# Altium PCB PCB1.PcbDoc
Units mil, origin at the board's own origin, x right, y up, seen from the top; angles counter-clockwise.
Board outline 1240.16 x 1131.89 mil, 4 copper layers (L1 SIGNAL, L2(GND), IL3 GND, L4 SIGNAL), stack 61.811 mil thick; 35 components, 27 nets, 172 pads, 66 vias.
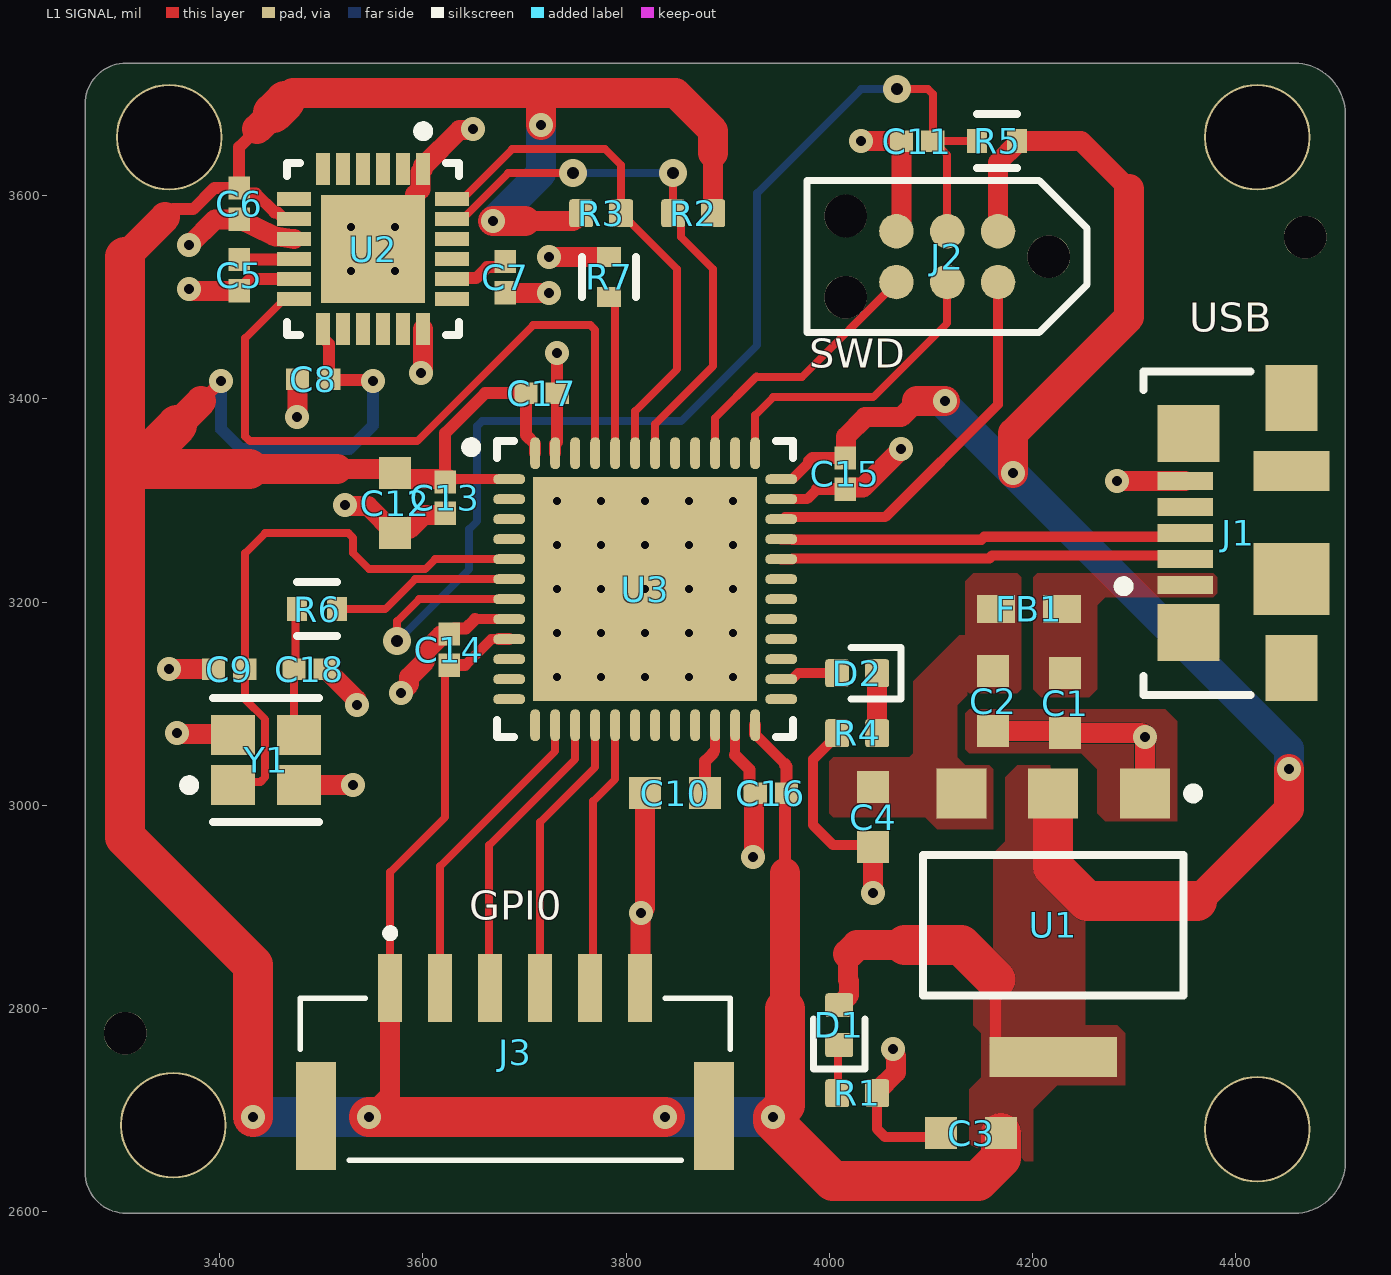
[diagram p0: L1 SIGNAL view]
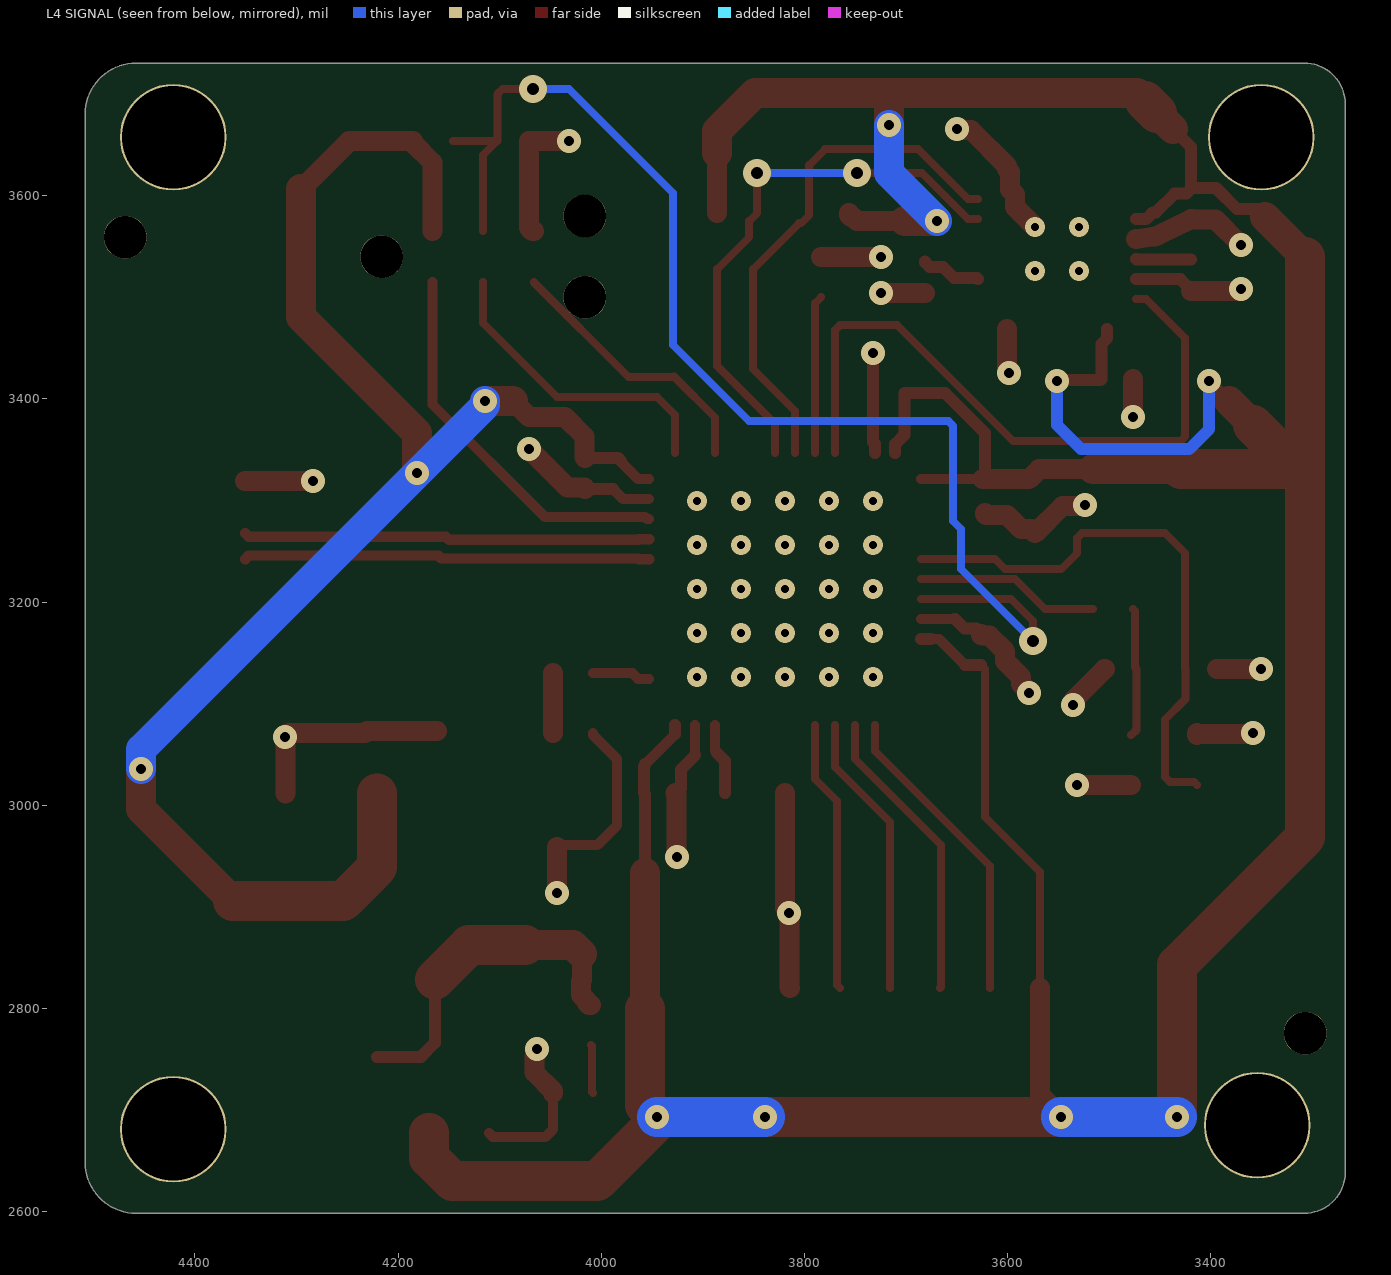
[diagram p1: L4 SIGNAL view, seen from below]
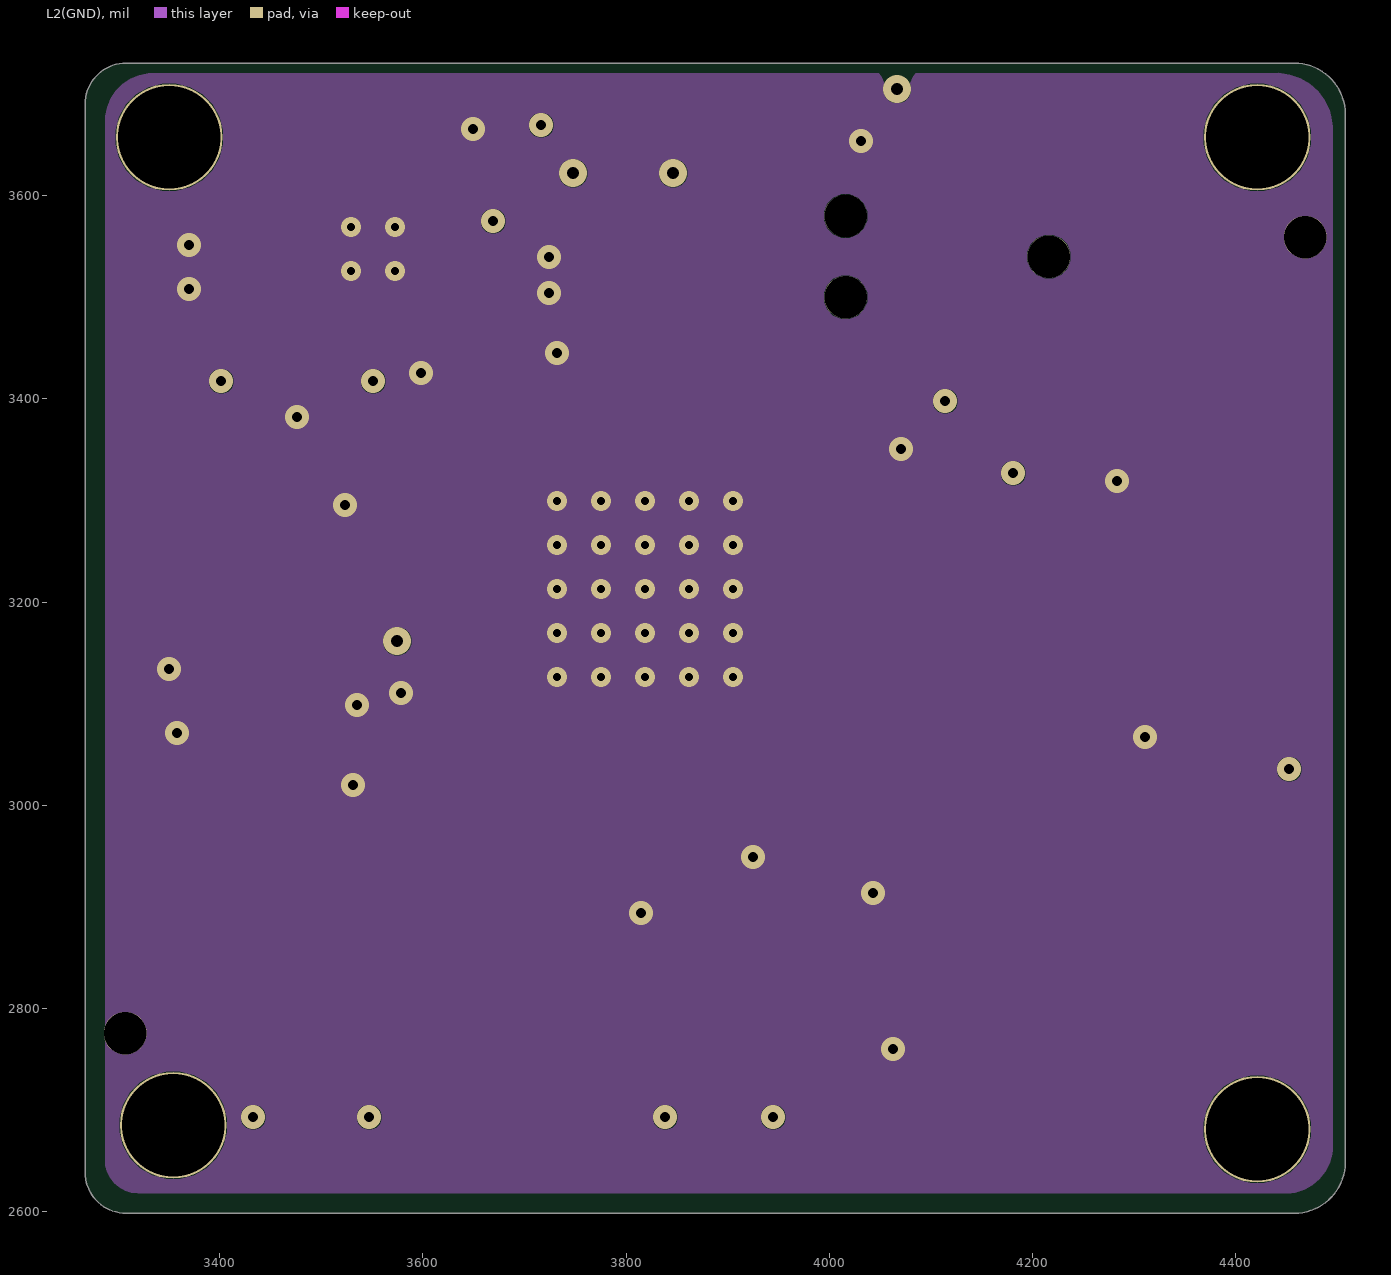
[diagram p2: L2(GND)]
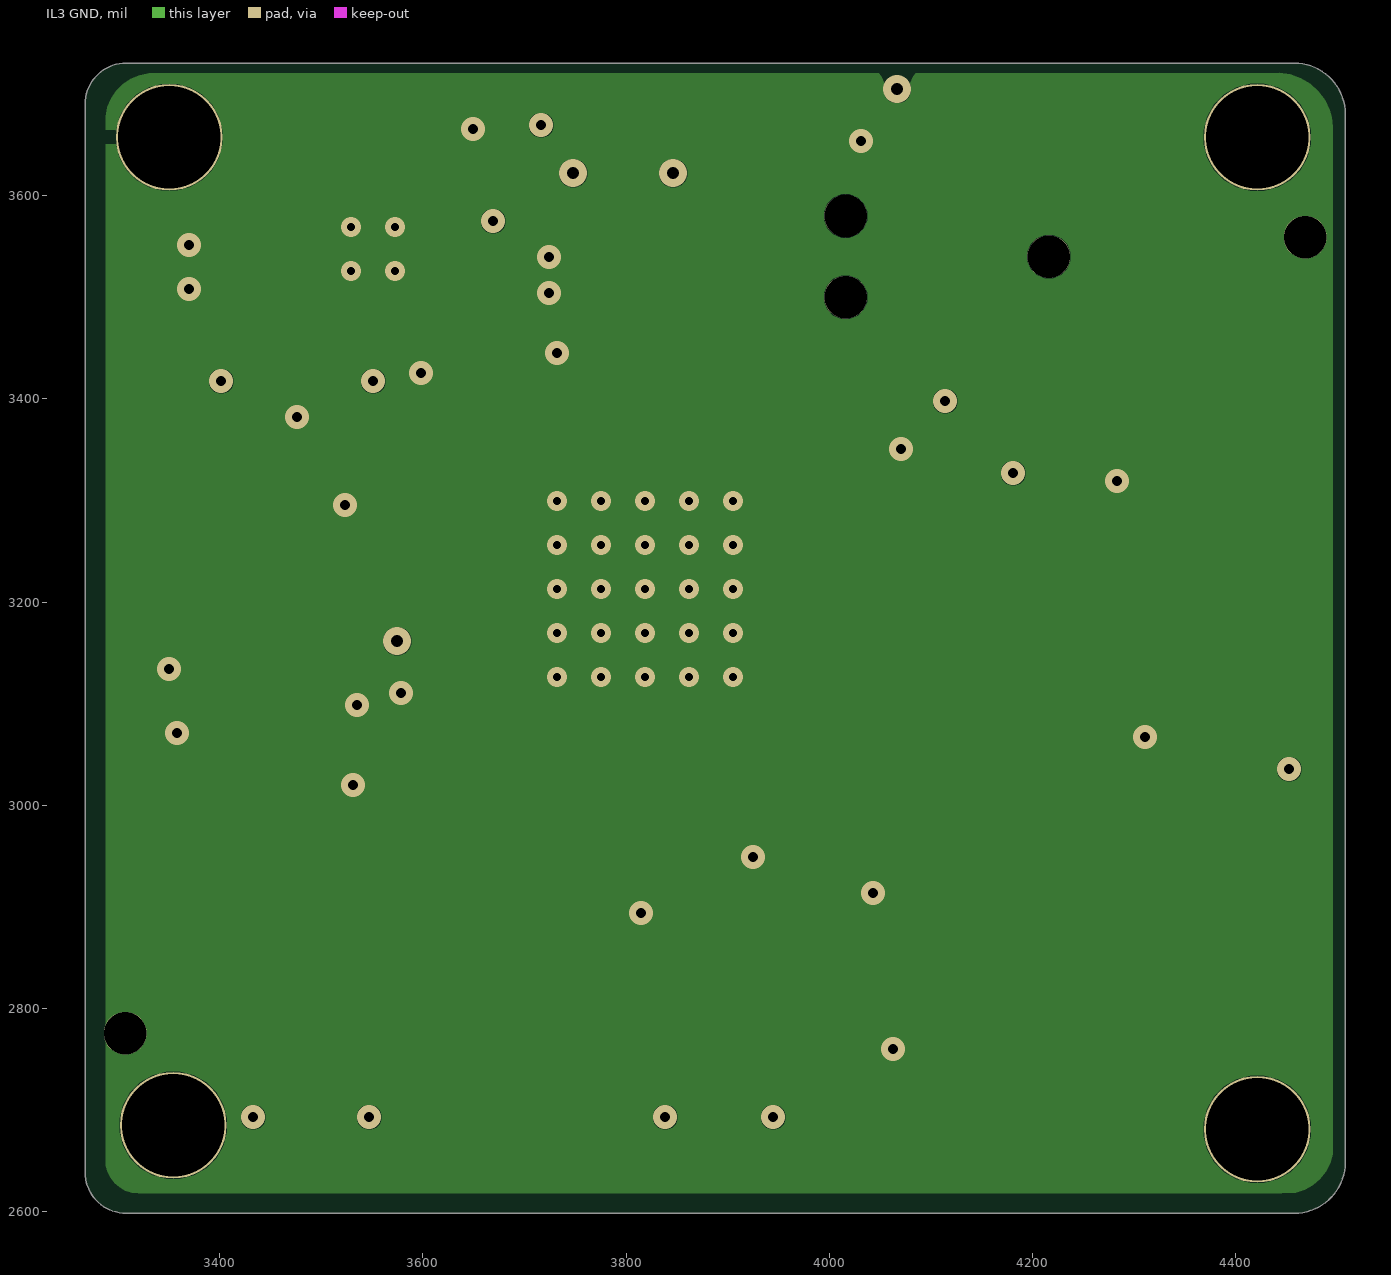
[diagram p3: IL3 GND]
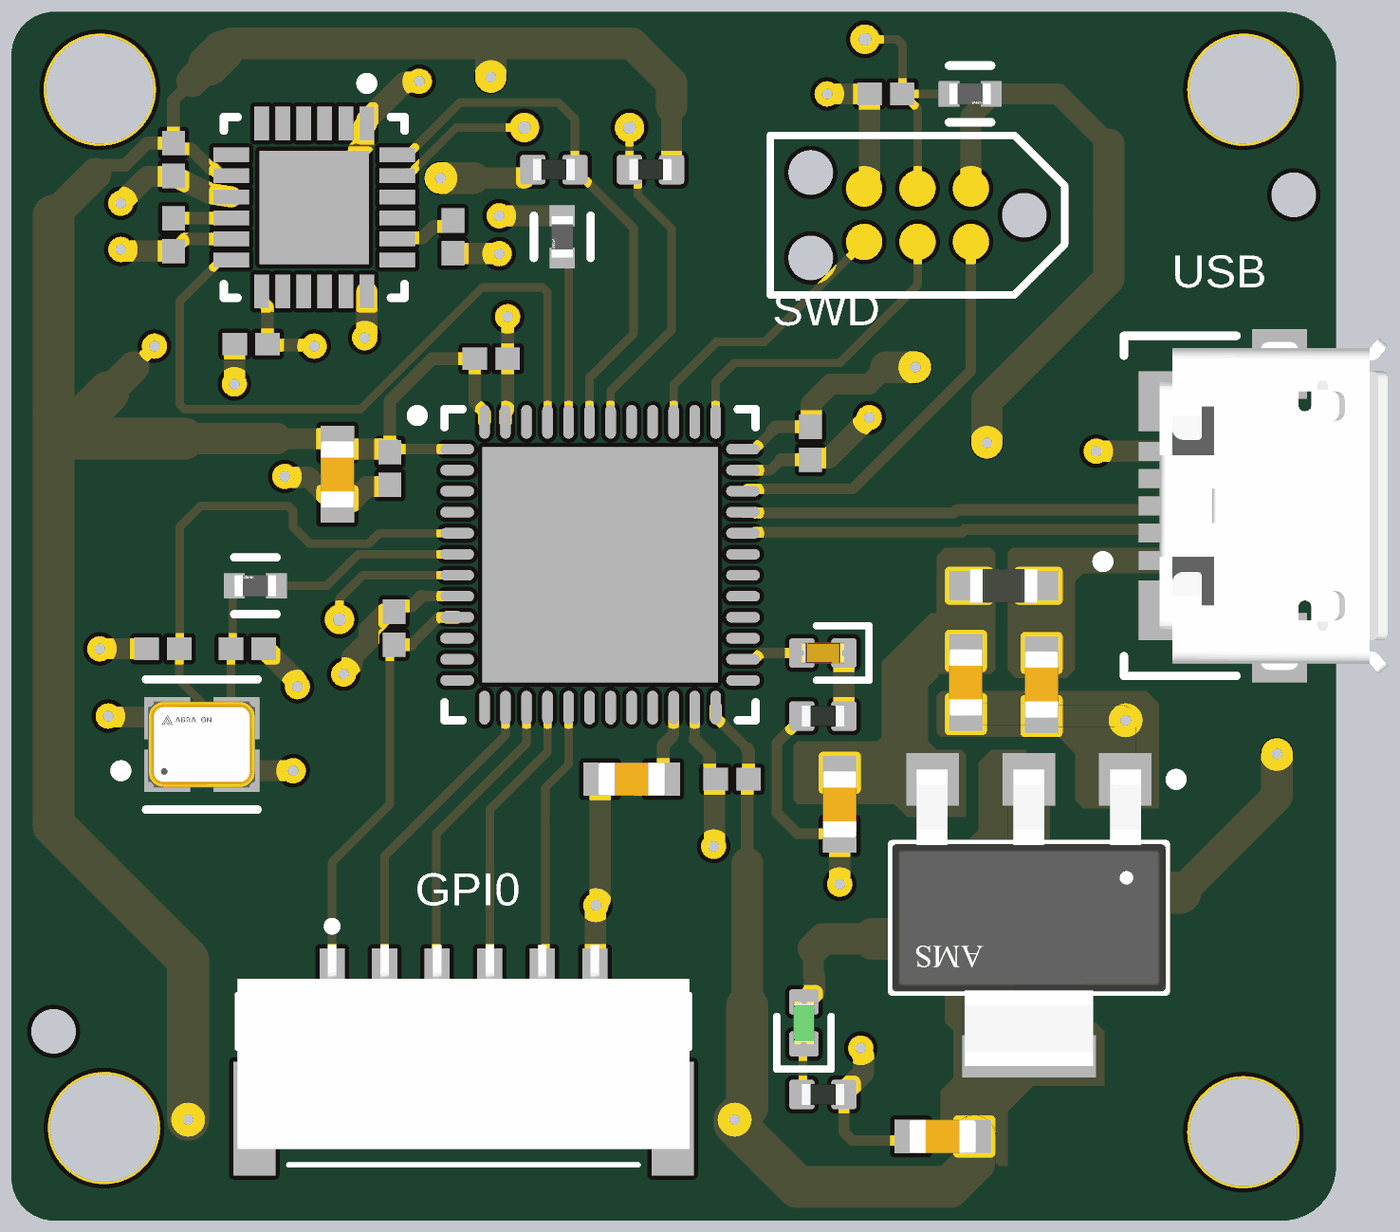
[diagram p4: 3D render of the assembled board from above, using the file's embedded part models]

## Layer stack, top to bottom
Top Solder: solder mask 1, SM-001, Dk 4
L1 SIGNAL: signal copper 1.378
Dielectric 1: prepreg 7.874, PP-017, Dk 4.6
L2(GND): signal copper 0.689
Dielectric 3: core 41.9291, Core-039, Dk 4.6
IL3 GND: signal copper 0.689
Dielectric 5: prepreg 7.874, PP-017, Dk 4.6
L4 SIGNAL: signal copper 1.378
Bottom Solder: solder mask 1, SM-001, Dk 4

## Board outline
3267.72,2638.58 ccw(c3307.87,2638.58) 3307.87,2598.43 4457.87,2598.43 ccw(c4457.87,2648.43) 4507.87,2648.43 4507.87,3680.32 ccw(c4457.87,3680.32) 4457.87,3730.32 3307.87,3730.32 ccw(c3307.87,3690.16) 3267.72,3690.16

## Design rules (kind name [scope] priority, off if disabled: settings)
Clearance [All] p1: gap=0.2 ignorepadtopadclearanceinfootprint=FALSE
DiffPairsRouting [All] p1: maxlimit=10 minlimit=8 mostfreqgap=10 toplayer_maxgap=8 toplayer_prefgap=8 toplayer_minwidth=10.28 toplayer_maxwidth=10.28 toplayer_prefwidth=10.28 bottomlayer_maxgap=8 bottomlayer_prefgap=8 bottomlayer_minwidth=10.28 bottomlayer_maxwidth=10.28 bottomlayer_prefwidth=10.28 impedanceprofiledriven=TRUE impedanceprofileid={FE83A02F-520A-4545-8AD8-354C31CD3F95} impedanceprofilevalue=90.000000 maxuncoupledlength=500
PolygonConnect [All] p1: connectstyle=Direct reliefconductorwidth=10 reliefentries=4 polygonreliefangle="90 Angle" airgapwidth=10
RoutingVias [All] p1: holewidth=11.81 width=27.56 viastyle="Through Hole" minholewidth=9.84 minwidth=10.04 maxholewidth=15.75 maxwidth=35.43
SolderMaskExpansion [All] p1: expansion=4 istentingtop=FALSE
SupplyNets "Schematic Supply Nets_3" [InNet('VBUS')] p1: voltage=0.000
SupplyNets "Schematic Supply Nets_2" [InNet('+3V3')] p2: voltage=0.000
SupplyNets "Schematic Supply Nets_1" [InNet('GND')] p3: voltage=0.000
SupplyNets "Schematic Supply Nets" [InNet('+5V')] p4: voltage=0.000
Width [All] p1: maxlimit=39.37 minlimit=7.87 preferedwidth=11.81 midlayer1_minwidth=10 midlayer1_maxwidth=10 midlayer1_prefwidth=10 midlayer2_minwidth=10 midlayer2_maxwidth=10 midlayer2_prefwidth=10 minimp=50.000000 maximp=50.000000 favimp=50.000000
29 further rules are at their usual default settings.

## Classes and differential pairs
net class diff_usb: USB_D_N USB_D_P
differential pair USB_D: +USB_D_P -USB_D_N

## Components (designator, comment, footprint, x,y, rotation, side; value= is the part's Value field where it differs from the comment)
C1 "2u2" WCAP-CSGP_0603_L1.6W0.8H0.8_Reflow 4232.28,3100.39 r270 top
C2 "2u2" WCAP-CSGP_0603_L1.6W0.8H0.8_Reflow 4161.42,3102.36 r270 top
C3 "22uf 0604 MASSOUT" WCAP-CSGP_0603_L1.6W0.8H0.8_Reflow 4139.76,2677.17 r180 top
C4 "22uf 0604 MASSOUT" WCAP-CSGP_0603_L1.6W0.8H0.8_Reflow 4043.31,2988.19 r270 top
C5 "2n2F" CAPC1005X56X25LL10T15 3419.29,3521.65 r90 top
C6 "10nF" CAPC1005X56X25LL10T15 3419.29,3592.13 r90 top
C7 "100nF" CAPC1005X56X25LL10T15 3681.1,3519.68 r90 top
C8 "100nF" CAPC1005X56X25LL10T15 3492.13,3419.29 r0 top
C9 "10pF" CAPC1005X56X25LL10T15 3409.45,3133.86 r180 top
C10 "2u2" WCAP-CSGP_0603_L1.6W0.8H0.8_Reflow 3848.43,3011.81 r180 top
C11 "100nF" CAPC1005X56X25LL10T15 4086.61,3653.54 r0 top
C12 "2.2u" WCAP-CSGP_0603_L1.6W0.8H0.8_Reflow 3572.83,3297.24 r270 top
C13 "100nF" CAPC1005X56X25LL10T15 3622.05,3302.76 r90 top
C14 "100nF" CAPC1005X56X25LL10T15 3625.98,3153.15 r270 top
C15 "100nF" CAPC1005X56X25LL10T15 4015.75,3326.38 r90 top
C16 "100nF" CAPC1005X56X25LL10T15 3942.52,3011.81 r0 top
C17 "100nF" CAPC1005X56X25LL10T15 3716.93,3405.51 r180 top
C18 "10pF" CAPC1005X56X25LL10T15 3488.58,3133.86 r180 top
D1 "GREEN" LED_0402_GREEN 4009.84,2783.46 r270 top
D2 "RED" LED_0402_RED 4027.56,3129.92 r0 top
FB1 "120R" "WE-CBF HF_0603_HC" 4196.85,3192.91 r180 top
J1 "473460001" FP-473460001-MFG 4441.34,3267.72 r90 top
J2 "TC2030-NL" TC2030-NL-FP 4116.14,3539.96 r180 top
J3 "SM06B-GHS-TB" JST_SM06B-GHS-TB 3690.94,2746.06 r0 top
R1 "1K" RES_0402 4027.56,2716.54 r180 top
R2 "2K2" RES_0402 3866.14,3582.68 r0 top
R3 "2K2" RES_0402 3775.59,3582.68 r180 top
R4 "1K" RES_0402 4027.56,3070.87 r0 top
R5 "10K" FP-AC0402-MFG 4165.35,3653.54 r0 top
R6 "0R" FP-AC0402-MFG 3496.06,3192.91 r180 top
R7 "10K" FP-AC0402-MFG 3783.46,3519.68 r270 top
U1 "AMS1117-3.3" FP-AMS1117-IPC_C 4220.47,2881.89 r270 top
U2 "MPU-6050" IS-QFN-24_V 3551.18,3547.24 r270 top
U3 "STM32F411CEU6" STM-UFQFPN48_L 3818.9,3212.6 r0 top
Y1 "24MHz" FP-ABM10AIG-MFG 3445.87,3044.29 r0 top

## Footprints (in the part's own frame and the unit in brackets; to place one, negate y for a bottom-side part, rotate by r counter-clockwise, add the part's x,y. Pads: shape width x height; smd on the part's side, far side on the other; paste and mask are expansions set on the pad)
CAPC1005X56X25LL10T15 [mm] "Chip Capacitor, 2-Leads, Body 1.00x0.50mm, IPC High Density"
  rect 0.58x0.54 smd: 1(-0.39,0) 2(0.39,0)
  body extent -0.55,-0.3 0.55,0.3, height 0.56
FP-473460001-MFG [mm]
  rect 0.45x1.38 smd paste+0 mask+0: 1(-1.3,2.31) 2(-0.65,2.31) 3(0,2.31) 4(0.65,2.31) 5(1.3,2.31)
  rect 1.425x1.55 smd paste+0 mask+0: 6(-2.488,2.225) 7(2.488,2.225)
  rect 1.65x1.3 smd paste+0 mask+0: 8(-3.375,-0.35) 11(3.375,-0.35)
  rect 1.8x1.9 smd paste+0 mask+0: 9(-1.15,-0.35)
  rect 1x1.9 smd paste+0 mask+0: 10(1.55,-0.35)
  silkscreen extent -4.05,0.67 4.05,3.97, body extent -3.99,-2.93 3.99,2.5, height 2.98
FP-ABM10AIG-MFG [mm]
  rect 1.1x1 smd paste+0 mask+0: 1(-0.825,-0.625) 2(0.825,-0.625) 3(0.825,0.625) 4(-0.825,0.625)
  silkscreen extent -2.05,-1.55 1.33,1.55, body extent -1.48,-1.22 1.48,1.22, height 0.25
FP-AC0402-MFG [mm]
  rect 0.5x0.6 smd paste+0 mask+0: 1(-0.5,0) 2(0.5,0)
  silkscreen extent -0.5,-0.67 0.5,0.67, body extent -0.85,-0.4 0.85,0.4, height 0.25
FP-AMS1117-IPC_C [mm]
  rect 1.25x1.25 smd paste+0 mask+0: 1(-3.295,2.29) 2(-3.295,0) 3(-3.295,-2.29)
  rect 1.004x3.182 smd paste+0 mask+0: 4(3.295,0)
  silkscreen extent -3.42,-3.25 1.75,3.63, body extent -3.9,-3.35 3.9,3.35, height 0.25
IS-QFN-24_V [mm] "QFN, 24-Leads, Body 4x4mm, Pitch 0.5mm, Thermal Pad 2.7x2.6mm"
  rect 0.8x0.35 smd: 1(-2,1.25) 2(-2,0.75) 3(-2,0.25) 4(-2,-0.25) 5(-2,-0.75) 6(-2,-1.25) 13(2,-1.25) 14(2,-0.75) 15(2,-0.25) 16(2,0.25) 17(2,0.75) 18(2,1.25)
  rect 0.35x0.85 smd mask+0.102: 7(-1.25,-1.975) 8(-0.75,-1.975) 9(-0.25,-1.975) 10(0.25,-1.975) 11(0.75,-1.975) 12(1.25,-1.975) 19(1.25,1.975) 20(0.75,1.975) 21(0.25,1.975) 22(-0.25,1.975) 23(-0.75,1.975) 24(-1.25,1.975)
  rect 2.7x2.6 smd: 25(0,0)
  silkscreen extent -3.07,-2.15 2.15,2.15, body extent -2,-2 2,2, height 0.95
JST_SM06B-GHS-TB [mm]
  rect 0.6x1.7 smd paste+0 mask+0.102: 1(-3.125,1.875) 2(-1.875,1.875) 3(-0.625,1.875) 4(0.625,1.875) 5(1.875,1.875) 6(3.125,1.875)
  rect 1x2.7 smd paste+0 mask+0.102: MP1(-4.975,-1.325) MP2(4.975,-1.325)
  silkscreen extent -5.38,-2.42 5.38,3.35, body extent -5.38,-2.05 5.38,2.8, height 4.25
LED_0402_GREEN [mm]
  rrect25% 0.6x0.7 smd: A(-0.5,0) K(0.5,0)
  silkscreen extent -0.15,-0.65 1.1,0.65, body extent -0.51,-0.25 0.51,0.25, height 0.45
LED_0402_RED [mm]
  rrect25% 0.6x0.7 smd: A(-0.5,0) K(0.5,0)
  silkscreen extent -0.15,-0.65 1.1,0.65, body extent -0.51,-0.25 0.51,0.25, height 0.45
RES_0402 [mm]
  rrect25% 0.6x0.7 smd: 1(-0.5,0) 2(0.5,0)
  body extent -0.5,-0.25 0.5,0.25, height 0.3
STM-UFQFPN48_L [mm] "QFN, 48-Leads, Body 7.1x7.1mm, Pitch 0.5mm, Thermal Pad 5.6x5.6mm, IPC High Density"
  oval 0.8x0.25 smd: 1(-3.4,2.75) 2(-3.4,2.25) 3(-3.4,1.75) 4(-3.4,1.25) 5(-3.4,0.75) 6(-3.4,0.25) 7(-3.4,-0.25) 8(-3.4,-0.75) 9(-3.4,-1.25) 10(-3.4,-1.75) 11(-3.4,-2.25) 12(-3.4,-2.75) 25(3.4,-2.75) 26(3.4,-2.25) 27(3.4,-1.75) 28(3.4,-1.25) 29(3.4,-0.75) 30(3.4,-0.25) 31(3.4,0.25) 32(3.4,0.75) 33(3.4,1.25) 34(3.4,1.75) 35(3.4,2.25) 36(3.4,2.75)
  oval 0.25x0.8 smd: 13(-2.75,-3.4) 14(-2.25,-3.4) 15(-1.75,-3.4) 16(-1.25,-3.4) 17(-0.75,-3.4) 18(-0.25,-3.4) 19(0.25,-3.4) 20(0.75,-3.4) 21(1.25,-3.4) 22(1.75,-3.4) 23(2.25,-3.4) 24(2.75,-3.4) 37(2.75,3.4) 38(2.25,3.4) 39(1.75,3.4) 40(1.25,3.4) 41(0.75,3.4) 42(0.25,3.4) 43(-0.25,3.4) 44(-0.75,3.4) 45(-1.25,3.4) 46(-1.75,3.4) 47(-2.25,3.4) 48(-2.75,3.4)
  rect 5.6x5.6 smd: 49(0,0)
  silkscreen extent -4.47,-3.7 3.7,3.7, body extent -3.55,-3.55 3.55,3.55, height 0.6
TC2030-NL-FP [mil]
  round 33.98 smd paste-16.99: 1(-50,-25) 2(-50,25) 3(0,-25) 4(0,25) 5(50,-25) 6(50,25)
  round 42.01 hole 42.01 unplated: MH(-100,0) MH(100,-40) MH(100,40)
  silkscreen extent -138,-75 138,75
WCAP-CSGP_0603_L1.6W0.8H0.8_Reflow [mm] "Ceramic Capacitors, body 1.6x0.8mm"
  rect 0.8x0.8 smd: 1(-0.75,0) 2(0.75,0)
  body extent -0.8,-0.4 0.8,0.4, height 0.8
"WE-CBF HF_0603_HC" [mm] "SMD EMI Suppression Ferrite  Bead, body 1.60x0.80mm"
  rect 0.95x0.7 smd: 1(-0.825,0) 2(0.825,0)
  body extent -0.8,-0.4 0.8,0.4, height 0.8

## Part data
C1 C2 C3 C4 C10 C12: library part CMP-03913-53914739-2, "WCAP-CSGP 0603 (1608Metric) Ceramic Capacitor 0.063Lx0.031W 1.60mmx0.80mm X7R ±10% 220pF", Capacitance=220pF, Case Code (Imperial)=0603, Case Code (Metric)=1608, Dielectric=X7R, Insulation Resistance=10GΩ, Max Operating Temperature=125°C, Min Operating Temperature=-55°C, Tolerance=10%, Voltage Rating=16V, Case/Package=0603, Height=800µm, Length=1.6mm, Mount="Surface Mount", Packaging="Tape & Reel (TR)", RoHS=Compliant, Thickness=863.6µm, Voltage Rating (DC)=16V, Width=800µm
C5 C6 C7 C8 C9 C11 C13 C14 C15 C16 C17 C18: library part CMP-2008-02845-1, Manufacturer="AVX Interconnect / Elco", Part Number=0402YD223KAT2A
D1: library part LED_0402_GREEN, "LED 0402 GREEN SMD"
D2: "LED 0402 RED SMD"
FB1: library part CMP-0220-00101-3, "Ferrite Bead (emi Suppression), 1.6X0.8X0.8MM (0603), 600O Impedance At 100 Mhz", Case Code (Imperial)=0603, Case Code (Metric)=1608, Case/Package=SMD/SMT, Current Rating=400mA, DC Resistance (DCR)=220mΩ, Max Current Rating=500mA, Max Operating Temperature=125°C, Min Operating Temperature=-55°C, Resistance=350mΩ, Test Frequency=100MHz, Tolerance=25%, Core Material=Ferrite, Depth=800µm, Height=800µm, Impedance=600Ω, Lead Free="Lead Free", Length=1.6mm, Max DC Current=500mA, Mount="Surface Mount", Number of Lines=1, Number of Pins=2, REACH SVHC=Unknown, RoHS=Compliant, Termination=SMD/SMT, Width=800µm
J1: library part CMP-2000-05246-2, "CONN RCPT USB2.0 MICRO B SMD R/A", Current Rating=1.8A, Manufacturer=Molex, Package=0, Temperature="-30°C to +85°C", Temperature Range High=+85°C, Temperature Range Low=-30°C, Voltage Rating=30V, Automotive=No, Category=Conn, ComponentLink2Description=Datasheet, ComponentLink2URL=https://www.molex.com/webdocs/datasheets/pdf/en-us/0473460001_IO_CONNECTORS.pdf, Conn Orientation="Right Angle", Contact Material=Gold,Nickel, Device Class L1=Connectors, Device Class L2="USB Connectors", Device Class L3=unset, Digikey Description="CONN RCPT USB2.0 MICRO B SMD R/A", Footprint Url=https://www.molex.com/pdm_docs/sd/473460001_sd.pdf, Height=2.945mm, Is Female=yes, Lead Free=Yes, Manufacturer Part Number=473460001, Number Of Contacts=5, Octopart=https://octopart.com/47346-0001-molex-7164928, Pitch=0.65mm, RoHS=TRUE, Shielding=true, Usb Standard="USB 2.0"
J2: "Tag-Connect No-Solder SWD Debug Connector (No Legs) DO NOT PLACE", Manufacturer=Tag-Connect, Manufacturer Part Number=TC2030-NL-FP
J3: library part CMP-002-00176-1, "Connector Header Surface Mount, Right Angle 6 position 0.049 (1.25mm)", Case/Package=None, Check_prices=https://www.snapeda.com/parts/SM06B-GHS-TB/JST/view-part/?ref=eda, Component Type=Standard, Design Item ID=SM06B-GHS-TB, MF="JST Sales", MP=SM06B-GHS-TB, Pins=6, SnapEDA_Link=https://www.snapeda.com/parts/SM06B-GHS-TB/JST/view-part/?ref=snap, Source=SM06B-GHS-TB.SchLib
R1 R2 R3 R4: library part RES_0402, "Resistor SMD 0402"
R5 R6 R7: library part CMP-03412-025001-2, "RES 11.3kΩ ±0.5% 0.063W 0402", RoHS Compliant=Yes
U1: library part CMP-209535-000001-1, "LDO Voltage Regulators 1A, 3.3V", Dropout Voltage=1.1V, Manufacturer="Advanced Monolithic Systems", Max Junction Temp=+125°C, Max Power Dissipation=1.2W, Max Supply Voltage=15V, Nominal Supply Current=5mA, Output Current=1A, Output Voltage=3.3V, Package=AMS1117, Temperature="-40°C to +125°C", Temperature Range Low=-40°C, Automotive=No, Category=IC, ComponentLink2Description=Datasheet, ComponentLink2URL=http://www.advanced-monolithic.com/pdf/ds1117.pdf, Device Class L1="Integrated Circuits (ICs)", Device Class L2="Power Management ICs", Device Class L3="Voltage Regulators - Linear", Height=1.8mm, Ipc Land Pattern Name=SOT229P700X180-4, Lead Free=Yes, Manufacturer Part Number=AMS1117-3.3, Number Of Outputs=1, Octopart=https://octopart.com/ams1117-3.3-advanced+monolithic+systems-25899300, Output Type=Fixed, RoHS=TRUE, Standoff Height=0.64mm, Temperature Range High=+125°C
U2: library part CMP-1753-00002-2, "3-Axis Gyroscope, Accelerometer and a Digital Motion Processor(TM) (DMP), 2.375 to 3.46 V, -40 to 85 degC, 24-Pin QFN, RoHS, Tape and Reel", Manufacturer=InvenSense, Standard Package=5,000, Category=Sensors,Transducers, Datasheet URL=http://datasheet.octopart.com/MPU-6050-InvenSense-datasheet-14421344.pdf, Datasheet Version="Rev. 3.3, 05/2012", Dynamic Catalog=MPU-6000™Series, Family=Multifunction, Featured Product=MPU-60506-Axis,IntegratedI²CSolution, Manufacturer URL=http://www.invensense.com/, Online Catalog=MPU-6000™Series, Other Names="1428-1007-2 / MPU6050", Output Type=Digital, Sensor Type=MotionTracking, Unit PriceUSD=Digital
U3: library part CMP-0243-00165-1, "ARM Cortex-M4 32-bit MCU+FPU, 512 KB Flash, 128 KB RAM, 36 I/Os, 48-Pin UFQFPN, -40 to 85 degC, Tray", I/Os (High Current)=36, Operating Frequency(F) (Processor speed) (MHz)=100, Package Description=UFQFPN48, Package Reference="48-Pin Ultra Thin Fine Pitch Quad Flat No-Lead, 7 x 7 x 0.6 mm Body, 0.5 mm Pitch, Exposed Pad", Supply Voltage(Vcc) min (V)=1.7, ComponentLink1Description="Manufacturer URL", ComponentLink1URL=http://www.st.com/, ComponentLink2Description=Datasheet, ComponentLink2URL=http://www.st.com/st-web-ui/static/active/en/resource/technical/document/datasheet/DM00115249.pdf, Core="ARM Cortex-M4", DatasheetVersion="Rev. 6", FLASH Size (Prog) (kB)=512, Internal RAM Size (kB)=128, Mounting Technology="Surface Mount", Packing=Tray
Y1: library part CMP-27762-010727-1, "Crystal 24MHz ±30ppm 10pF SMD-4 2.5mm x 2mm Automotive", Case/Package=SMD/SMT, ESR (Equivalent Series Resistance)=60R, Frequency Stability=50ppm, Frequency Tolerance=30ppm, Load Capacitance=10pF, Max Operating Temperature=105°C, Min Operating Temperature=-40°C, Ratings=AEC-Q200, Frequency=24MHz, Height=0.024inch, Length=0.098inch, Mount="Surface Mount", Packaging="Tape and Reel", RoHS Compliant=Yes, Width=0.079inch

## Free pads (board coordinates)
  round 42.01 hole 42.01 unplated: MH(3307.09,2775.59) MH(4468.5,3559.06)
  round 105 hole 100.98: MH(3350.39,3657.48) MH(3354.33,2685.04) MH(4421.26,2681.1) MH(4421.26,3657.48)

## Via types
v1: diameter 23.62, hole 9.84, L1 SIGNAL to L4 SIGNAL, 32 vias
v2: diameter 19.68, hole 7.87, L1 SIGNAL to L4 SIGNAL, 29 vias
v3: diameter 27.56, hole 11.81, L1 SIGNAL to L4 SIGNAL, 4 vias
v4: diameter 23.62/23.62/23.62/23.62 (per signal layer), hole 9.84, L1 SIGNAL to L4 SIGNAL, 1 vias

## Nets (pads, with @x,y where several pads share a name; then routed paths per layer and width w, separated by ;. In a path a pad name is that pad's centre, name@x,y a point inside that pad or via, vN(x,y) a via of type N, cw(c..) or ccw(c..) an arc to the next point about the centre after c; other vN are vias at no path point)
+3V3: C3.1 C6.2 C8.2 C12.1 C13.2 C14.2 C15.2 C16.2 C17.2 D1.A J2.1 J3.1 R2.2 R3.2 R5.2 U1.2 U1.4 U2.8 U2.13 U3.1 U3.9 U3.24 U3.36 U3.48 | length 6791.9
  L1 SIGNAL w7.87: J3.1 3567.91,2934.06 3622.05,2988.19 3622.05,3133.86 C14.2
  L1 SIGNAL w9.84: C13.2@3624.8,3320.87 U3.1 ; 3641.73,3137.8 3667.32,3163.39 U3.9@3675.2,3163.39 ; U3.24@3927.17,3069.88 3956.69,3040.35 ; U3.36 3963.58,3320.87 3980.32,3337.6 3980.32,3338.58
  L1 SIGNAL w11.81: 3346.46,3578.74 3354.33,3586.61 3374.02,3586.61 3394.88,3607.48 C6.2 3419.29,3647.64 3437.01,3665.35 ; 3381.89,3397.64 v1(3401.57,3417.32) ; C6.2@3419.29,3606.69 3424.02,3601.97 3435.66,3601.97 3454.16,3583.46 3456.89,3583.46 3463.58,3576.77 U2.8 ; U2.13 3501.97,3459.65 3507.48,3454.13 C8.2 3508.46,3418.31 3550.2,3418.31 v1(3551.18,3417.32) ; C13.2@3624.8,3320.87 3622.05,3323.62 3622.05,3366.14 3661.42,3405.51 C17.2 3701.57,3364.37 3710.63,3355.32 U3.48 ; C14.2 3641.73,3137.8 ; U3.9@3675.2,3163.39 U3.9 ; U3.24@3927.17,3069.88 U3.24 ; 3956.69,2933.07 3956.69,3010.63 C16.2 3957.87,3038.19 3956.69,3039.37 3956.69,3040.35 ; 3980.32,3338.58 3983.46,3341.73 C15.2 ; 4163.74,2828.39 4163.74,2766.03 4177.6,2752.17 U1.4
  L1 SIGNAL w19.68: 3515.75,3330.71 3568.9,3330.71 3578.74,3320.87 C13.2@3624.8,3320.87 ; v1(3547.24,2692.91) 3547.24,2693.98 3567.91,2714.65 J3.1 ; 3700.79,3574.8 3748.03,3574.8 3751.97,3578.74 3753.94,3578.74 3755.91,3580.71 R3.2 ; R2.2 3885.83,3641.73 ; D1.A 4011.81,2803.15 4013.78,2805.12 4013.78,2807.09 4019.68,2812.99 4019.68,2826.77 4018.73,2827.73 4018.73,2853.38 ; C15.2 4016.54,3342.52 4016.54,3362.99 4035.43,3381.89 4070.87,3381.89 4086.61,3397.64 ; J2.1 4166.14,3632.68 4185.04,3651.57 R5.2 4248.03,3653.54 4295.28,3606.3
  L1 SIGNAL w29.53: 3307.09,3539.37 3346.46,3578.74 ; 3358.27,3374.02 3381.89,3397.64 ; 3429.13,3330.71 3515.75,3330.71 ; 3437.01,3665.35 3452.76,3681.1 ; 3464.57,3692.91 3472.44,3700.79 3716.54,3700.79 ; v1(3669.29,3574.8) 3700.79,3574.8 ; v1(3716.54,3669.29) 3716.54,3700.79 ; 3885.83,3641.73 3885.83,3663.81 3848.84,3700.79 3716.54,3700.79 ; 3956.69,2799.21 3956.69,2933.07 ; 4018.73,2853.38 4027.56,2862.2 4074.8,2862.2 ; 4086.61,3397.64 v1(4114.17,3397.64) ; v1(4181.1,3326.77) 4181.1,3366.14 4295.28,3480.32 4295.28,3606.3 ; 4362.2,2905.51 4452.76,2996.06 v1(4452.76,3035.43)
  L1 SIGNAL w39.37: 3307.09,3539.37 3307.09,3326.77 ; 3358.27,3374.02 3311.02,3326.77 3307.09,3326.77 ; 3429.13,3330.71 3311.02,3330.71 3307.09,3326.77 ; v1(3433.07,2692.91) 3433.07,2842.52 3307.09,2968.5 3307.09,3326.77 ; 3452.76,3681.1 3464.57,3692.91 ; v1(3547.24,2692.91) v1(3838.58,2692.91) ; 3956.69,2799.21 3956.69,2704.72 v1(3944.88,2692.91) 3944.88,2688.98 4003.94,2629.92 4146.23,2629.92 4169.29,2652.98 C3.1 ; 4074.8,2862.2 4129.92,2862.2 4163.74,2828.39 ; U1.2 4220.47,2938.98 4253.94,2905.51 4362.2,2905.51
  L4 SIGNAL w11.81: v1(3401.57,3417.32) 3401.57,3370.08 3421.26,3350.39 3527.56,3350.39 3551.18,3374.02 v1(3551.18,3417.32)
  L4 SIGNAL w29.53: v1(3669.29,3574.8) 3716.54,3622.05 v1(3716.54,3669.29) ; v1(4114.17,3397.64) 4114.17,3393.7 4452.76,3055.12 v1(4452.76,3035.43)
  L4 SIGNAL w39.37: v1(3433.07,2692.91) v1(3547.24,2692.91) ; v1(3838.58,2692.91) v1(3944.88,2692.91)
+5V: C2.1 C4.1 FB1.2 U1.3
GND: C1.2 C2.2 C3.2 C4.2 C5.1 C6.1 C7.1 C8.1 C9.2 C10.2 C11.1 C12.2 C13.1 C14.1 C15.1 C16.1 C17.1 C18.1 J1.5 J2.5 J3.6 pad.MH@3307.09,2775.59 pad.MH@4468.5,3559.06 R1.1 R4.1 R7.1 U1.1 U2.1 U2.9 U2.11 U2.18 U2.25 U3.8 U3.23 U3.35 U3.47 U3.49 Y1.2 Y1.4 | length 2358.6
  L1 SIGNAL w9.84: 3651.57,3183.07 U3.8 ; 3907.48,3049.21 U3.23 ; U3.35 3978.35,3301.18 3988.19,3311.02 ; R4.1 4007.87,3068.9 3984.25,3045.28 3984.25,2980.31 4003.94,2960.63 4041.34,2960.63 C4.2 ; R1.1 4047.24,2681.1 4055.12,2673.23 4106.3,2673.23 C3.2
  L1 SIGNAL w11.81: C5.1@3419.29,3507.09 3429.92,3517.72 U2.11 ; C14.1@3625.98,3169.29 3630.71,3174.02 3642.52,3174.02 3651.57,3183.07 ; U3.47 3730.31,3355.32 3732.28,3357.28 C17.1 v1(3732.28,3444.88) ; 3907.48,3049.21 3921.65,3035.04 3921.65,3016.54 3926.38,3011.81 3926.74,3011.81 C16.1 ; 3988.19,3311.02 C15.1
  L1 SIGNAL w19.68: v1(3350.39,3133.86) C9.2 ; v1(3358.27,3070.87) 3359.02,3070.11 3412.63,3070.11 3413.39,3070.87 Y1.4 ; v4(3370.08,3507.87) ccw(c3371.65,3507.87) 3371.65,3506.3 C5.1 ; v1@3370.83,3551.93 3395.26,3576.36 3418.88,3576.36 C6.1 3420.08,3576.39 3452.33,3560.84 ccw(c3456.69,3569.88) 3455.15,3559.96 U2.9 ; v1(3476.38,3381.89) 3476.57,3382.09 3476.57,3419.09 C8.1 ; Y1.2 v1(3531.5,3019.68) ; C18.1 3504.72,3133.86 3534.68,3103.9 3534.68,3099.18 v1(3535.43,3098.43) ; v1(3523.62,3295.28) 3524.38,3294.52 3546.03,3294.52 C12.2 3576.77,3271.65 3586.61,3271.65 3600.79,3285.83 3621.26,3285.83 3622.05,3286.61 C13.1 ; v2(3572.83,3568.9) 3592.52,3588.58 3592.52,3600.96 3597.64,3606.08 3597.64,3623.23 U2.1 ; v1(3578.74,3110.24) 3578.74,3111.3 3586.61,3119.18 3586.61,3125.98 3602.36,3141.73 3602.36,3151.46 3617.83,3166.93 3625.2,3166.93 3625.98,3167.72 C14.1 ; v1(3598.43,3425.2) 3598.43,3426.26 3600.39,3428.23 U2.18 ; U2.1@3600.39,3628.94 3636.06,3664.6 3648.85,3664.6 v1(3649.61,3665.35) ; C7.1 3681.3,3504.13 3724.21,3504.13 v1(3724.41,3503.94) ; v1(3724.41,3539.37) 3779.53,3539.37 R7.1 ; J3.6 3814.47,2820.37 3814.47,2893.21 v1(3814.96,2893.7) 3814.96,2894.77 3818.9,2898.7 C10.2 ; v1(3925.2,2948.82) 3925.95,2949.57 3925.95,3011.02 C16.1@3926.74,3011.81 ; C15.1 4015.75,3311.81 4016.54,3312.6 4033.07,3312.6 v1(4070.87,3350.39) ; v1(4031.5,3653.54) C11.1 4071.26,3570.08 cw(c4066.14,3570.08) J2.5 ; v1(4043.31,2913.39) C4.2 ; R1.1 4047.24,2718.5 4065.67,2736.93 4065.67,2753.23 4063.75,2755.15 4063.75,2759.09 v1(4062.99,2759.84) ; C2.2 4230.31,3072.83 cw(c4230.31,3070.87) C1.2 4307.09,3070.87 cw(c4307.09,3066.93) v1(4311.02,3066.93) 4310.63,3066.93 U1.1 ; v1(4283.46,3318.9) J1.5
  other v1: 3370.08,3551.18
  other v2: 3732.28,3125.98 3775.59,3125.98 3818.9,3125.98 3862.2,3125.98 3905.51,3125.98 3732.28,3169.29 3775.59,3169.29 3818.9,3169.29 3862.2,3169.29 3905.51,3169.29 3732.28,3212.6 3775.59,3212.6 3818.9,3212.6 3862.2,3212.6 3905.51,3212.6 3732.28,3255.91 3775.59,3255.91 3818.9,3255.91 3862.2,3255.91 3905.51,3255.91 3732.28,3299.21 3775.59,3299.21 3818.9,3299.21 3862.2,3299.21 3905.51,3299.21 3529.53,3525.59 3572.83,3525.59 3529.53,3568.9
"IMU REGOUT": C5.2 U2.10 | length 54.3
  L1 SIGNAL w11.81: C5.2 3419.49,3537.2 3473.23,3537.2 U2.10
IMU_INT: U2.12 U3.45 | length 677.9
  L1 SIGNAL w7.87: U2.12 3463.58,3498.03 3425.2,3459.65 3425.2,3362.88 3429.81,3358.27 3594.49,3358.27 3708.66,3472.44 3765.07,3472.44 3769.68,3467.83 U3.45
IMU_SCL: R2.1 U2.23 U3.42 | length 551.8
  L1 SIGNAL w7.87: U2.23 3638.78,3576.77 3684.05,3622.05 v3(3748.03,3622.05) ; U3.42 3828.74,3375.31 3885.83,3432.4 3885.83,3527.56 3854.33,3559.06 3854.33,3574.8 R2.1 v3(3846.46,3622.05)
  L4 SIGNAL w7.87: v3(3748.03,3622.05) v3(3846.46,3622.05)
IMU_SDA: R3.1 U2.24 U3.43 | length 515.8
  L1 SIGNAL w7.87: U2.24 3638.78,3596.46 3687.99,3645.67 3779.53,3645.67 3795.28,3629.92 R3.1 ; R3.1@3795.28,3580.71 3803.15,3572.83 3805.12,3572.83 3850.39,3527.56 3850.39,3429.13 3809.05,3387.8 U3.43
LED_PWR_K: D1.K R1.2 | length 48.1
  L1 SIGNAL w7.87: R1.2 4008.86,2717.52 4008.86,2762.8 D1.K
"MCU BOOT0": R7.2 U3.44 | length 156
  L1 SIGNAL w7.87: R7.2 3789.37,3494.09 U3.44
"MCU NRST": C11.2 J2.3 R5.1 U3.7 | length 1243.1
  L1 SIGNAL w7.87: v3(3574.8,3161.42) 3574.8,3181.1 3596.46,3202.76 U3.7 ; v3(4066.93,3704.72) 4097.36,3704.72 4101.97,3700.11 C11.2 R5.1 ; C11.2@4102.76,3653.54 4116.14,3640.16 J2.3
  L4 SIGNAL w7.87: v3(3574.8,3161.42) 3645.67,3232.28 3645.67,3271.65 3653.54,3279.53 3653.54,3373.34 3658.16,3377.95 3854.33,3377.95 3929.13,3452.76 3929.13,3602.36 4031.5,3704.72 v3(4066.93,3704.72)
"MCU OSC IN": C9.1 U3.5 Y1.1 | length 559.3
  L1 SIGNAL w7.87: Y1.1 3416.65,3022.95 3440.27,3022.95 3444.88,3027.56 3444.88,3084.59 3424.8,3104.67 C9.1 3425.2,3134.25 3425.2,3248.03 3444.88,3267.72 3526.88,3267.72 3531.5,3263.1 3531.5,3248.03 3547.24,3232.28 3602.36,3232.28 3612.2,3242.13 U3.5
"MCU OSC OUT": R6.1 U3.6 | length 181.5
  L1 SIGNAL w7.87: R6.1 3562.99,3192.91 3592.52,3222.44 U3.6
"MCU VCAP1": C10.1 U3.22 | length 71
  L1 SIGNAL w9.84: 3885.83,3051.18 3887.8,3053.15 U3.22
  L1 SIGNAL w11.81: C10.1 3877.95,3043.31 3885.83,3051.18
MCU_LED_A: D2.A U3.26 | length 57.6
  L1 SIGNAL w9.84: U3.26 3963.58,3124.02 3963.58,3124.16 3969.35,3129.92 D2.A
MCU_LED_K: D2.K R4.2 | length 59.1
  L1 SIGNAL w19.68: R4.2 D2.K
MCU_PA4: J3.2 U3.14 | length 305.7
  L1 SIGNAL w7.87: J3.2 3617.13,2939.96 3730.31,3053.15 U3.14
MCU_PA5: J3.3 U3.15 | length 294.3
  L1 SIGNAL w7.87: J3.3 3665.35,2820.87 3665.35,2960.63 3750,3045.28 U3.15
MCU_PA6: J3.4 U3.16 | length 281.3
  L1 SIGNAL w7.87: J3.4 3715.55,2983.27 3769.68,3037.4 U3.16
MCU_PA7: J3.5 U3.17 | length 269.1
  L1 SIGNAL w7.87: J3.5 3767.72,2822.83 3767.72,3003.94 3789.37,3025.59 U3.17
MCU_SWCLK: J2.4 U3.37 | length 304.4
  L1 SIGNAL w7.87: U3.37 3927.17,3383.86 3944.88,3401.57 4043.31,3401.57 4116.14,3474.41 J2.4
MCU_SWDIO: J2.2 U3.34 | length 380.7
  L1 SIGNAL w9.84: U3.34 3954.72,3281.5 3956.69,3283.46 4055.12,3283.46 4166.14,3394.49 J2.2
MCU_SWO: J2.6 U3.39 | length 269.4
  L1 SIGNAL w7.87: U3.39 3887.8,3381.27 3928.46,3421.94 3929.13,3421.26 3973,3421.26 4066.14,3514.41 J2.6
NetC7_2: C7.2 U2.20 | length 59.8
  L1 SIGNAL w11.81: U2.20 3629.92,3518.7 3652.56,3518.7 3663.39,3529.53 3676.38,3529.53 3681.1,3534.25 C7.2
USB_D_N: J1.2 U3.32 | length 400.7
  L1 SIGNAL w10.28: U3.32 3963.15,3242.13 3963.85,3242.83 4157.41,3242.83 4160.36,3245.78 4346.74,3245.78 J1.2
USB_D_P: J1.3 U3.33 | length 400.7
  L1 SIGNAL w10.28: U3.33 3963.15,3261.81 3963.85,3261.11 4149.84,3261.11 4152.79,3264.06 4346.74,3264.06 J1.3
VBUS: C1.1 FB1.1 J1.1
"XTAL IN": C18.2 R6.2 Y1.3 | length 127.4
  L1 SIGNAL w7.87: R6.2 3474.8,3191.34 3474.8,3135.43 C18.2 3473.23,3074.02 Y1.3
pads on no net: J1.4 J1.6 J1.7 J1.8 J1.9 J1.10 J1.11 J2.MH J3.MP1 J3.MP2 U2.2 U2.3 U2.4 U2.5 U2.6 U2.7 U2.14 U2.15 U2.16 U2.17 U2.19 U2.21 U2.22 U3.2 U3.3 U3.4 U3.10 U3.11 U3.12 U3.13 U3.18 U3.19 U3.20 U3.21 U3.25 U3.27 U3.28 U3.29 U3.30 U3.31 U3.38 U3.40 U3.41 U3.46

## Polygon pours and split planes (outlines as drawn)
+3V3 on L1 SIGNAL "+3V3_L01_P007" (solid, pour order 7): 4161.42,2850.39 4141.73,2850.39 4141.73,2783.46 4149.61,2775.59 4149.61,2732.28 4137.8,2720.47 4137.8,2649.61 4200.79,2649.61 4200.79,2700.79 4224.41,2724.41 4291.34,2724.41 4291.34,2775.59 4283.46,2783.46 4251.97,2783.46 4251.97,3031.5 4244.09,3039.37 4185.04,3039.37 4173.23,3027.56 4173.23,2964.57 4161.42,2952.76
GND on L1 SIGNAL "GND_L01_P012" (solid, pour order 12): 4342.52,2984.25 4342.52,3082.68 4330.71,3094.49 4137.8,3094.49 4133.86,3090.55 4133.86,3055.12 4137.8,3051.18 4248.03,3051.18 4263.78,3035.43 4263.78,2992.13 4271.65,2984.25
+5V on L1 SIGNAL "+5V_L01_P005" (solid, pour order 5): 4082.68,3051.18 4078.74,3047.24 4003.94,3047.24 4000,3043.31 4000,2992.13 4003.94,2988.19 4094.49,2988.19 4106.3,2976.38 4161.42,2976.38 4161.42,3035.43 4157.48,3039.37 4133.86,3039.37 4125.98,3047.24 4125.98,3098.43 4135.83,3108.27 4135.83,3112.2 4137.8,3110.24 4185.04,3110.24 4188.98,3114.17 4188.98,3224.41 4185.04,3228.35 4141.73,3228.35 4133.86,3220.47 4133.86,3167.32 4127.95,3167.32 4082.68,3122.05
VBUS on L1 SIGNAL "VBUS_L01_P003" (solid, pour order 3): 4377.95,3204.72 4381.89,3208.66 4381.89,3224.41 4377.95,3228.35 4204.72,3228.35 4200.79,3224.41 4200.79,3114.17 4208.66,3106.3 4255.91,3106.3 4263.78,3114.17 4263.78,3196.85 4271.65,3204.72
GND on L2(GND) "GND_L02_P010" (solid, pour order 10): 3287.4,3673.23 cw(c3334.65,3673.23) 3334.65,3720.47 4437.01,3720.47 cw(c4439.96,3664.96) 4495.47,3667.91 4495.47,2660.83 cw(c4448.82,2664.76) 4444.88,2618.11 3322.83,2618.11 cw(c3320.28,2650.98) 3287.4,2648.43 3287.4,3496.06
GND on IL3 GND "GND_L03_P011" (solid, pour order 11): 3287.77,3673.28 cw(c3335.02,3673.28) 3335.02,3720.53 4437.38,3720.53 cw(c4440.33,3665.02) 4495.85,3667.97 4495.85,2660.88 cw(c4449.2,2664.81) 4445.25,2618.17 3323.21,2618.17 cw(c3320.65,2651.04) 3287.77,2648.48 3287.77,3496.12

## Silkscreen, mask and mechanical layers (free items; w line width, h text height)
Top Overlay:
  text "USB" at 4354.33,3456.69 h49
  text "SWD" at 3980.32,3421.26 h49
  text "GPI0" at 3645.67,2877.95 h49

## Text inside footprints (layer, text, board x,y; h text height)
D1: Top 3D Body "+" at 4029.86,2857.61 h19.68 r270
D2: Top 3D Body "+" at 3953.42,3149.94 h19.68